# Altium PCB MT-MONITOR V1.0.0.PcbDoc (part 3 of 3)
Units mil, origin at the board's own origin, x right, y up, seen from the top; angles counter-clockwise.
Board outline 6300 x 4410 mil, 2 copper layers (Top Layer, Bottom Layer); 313 components, 231 nets, 1781 pads, 138 vias.
Unrouted connection lines stored in the file: 1.
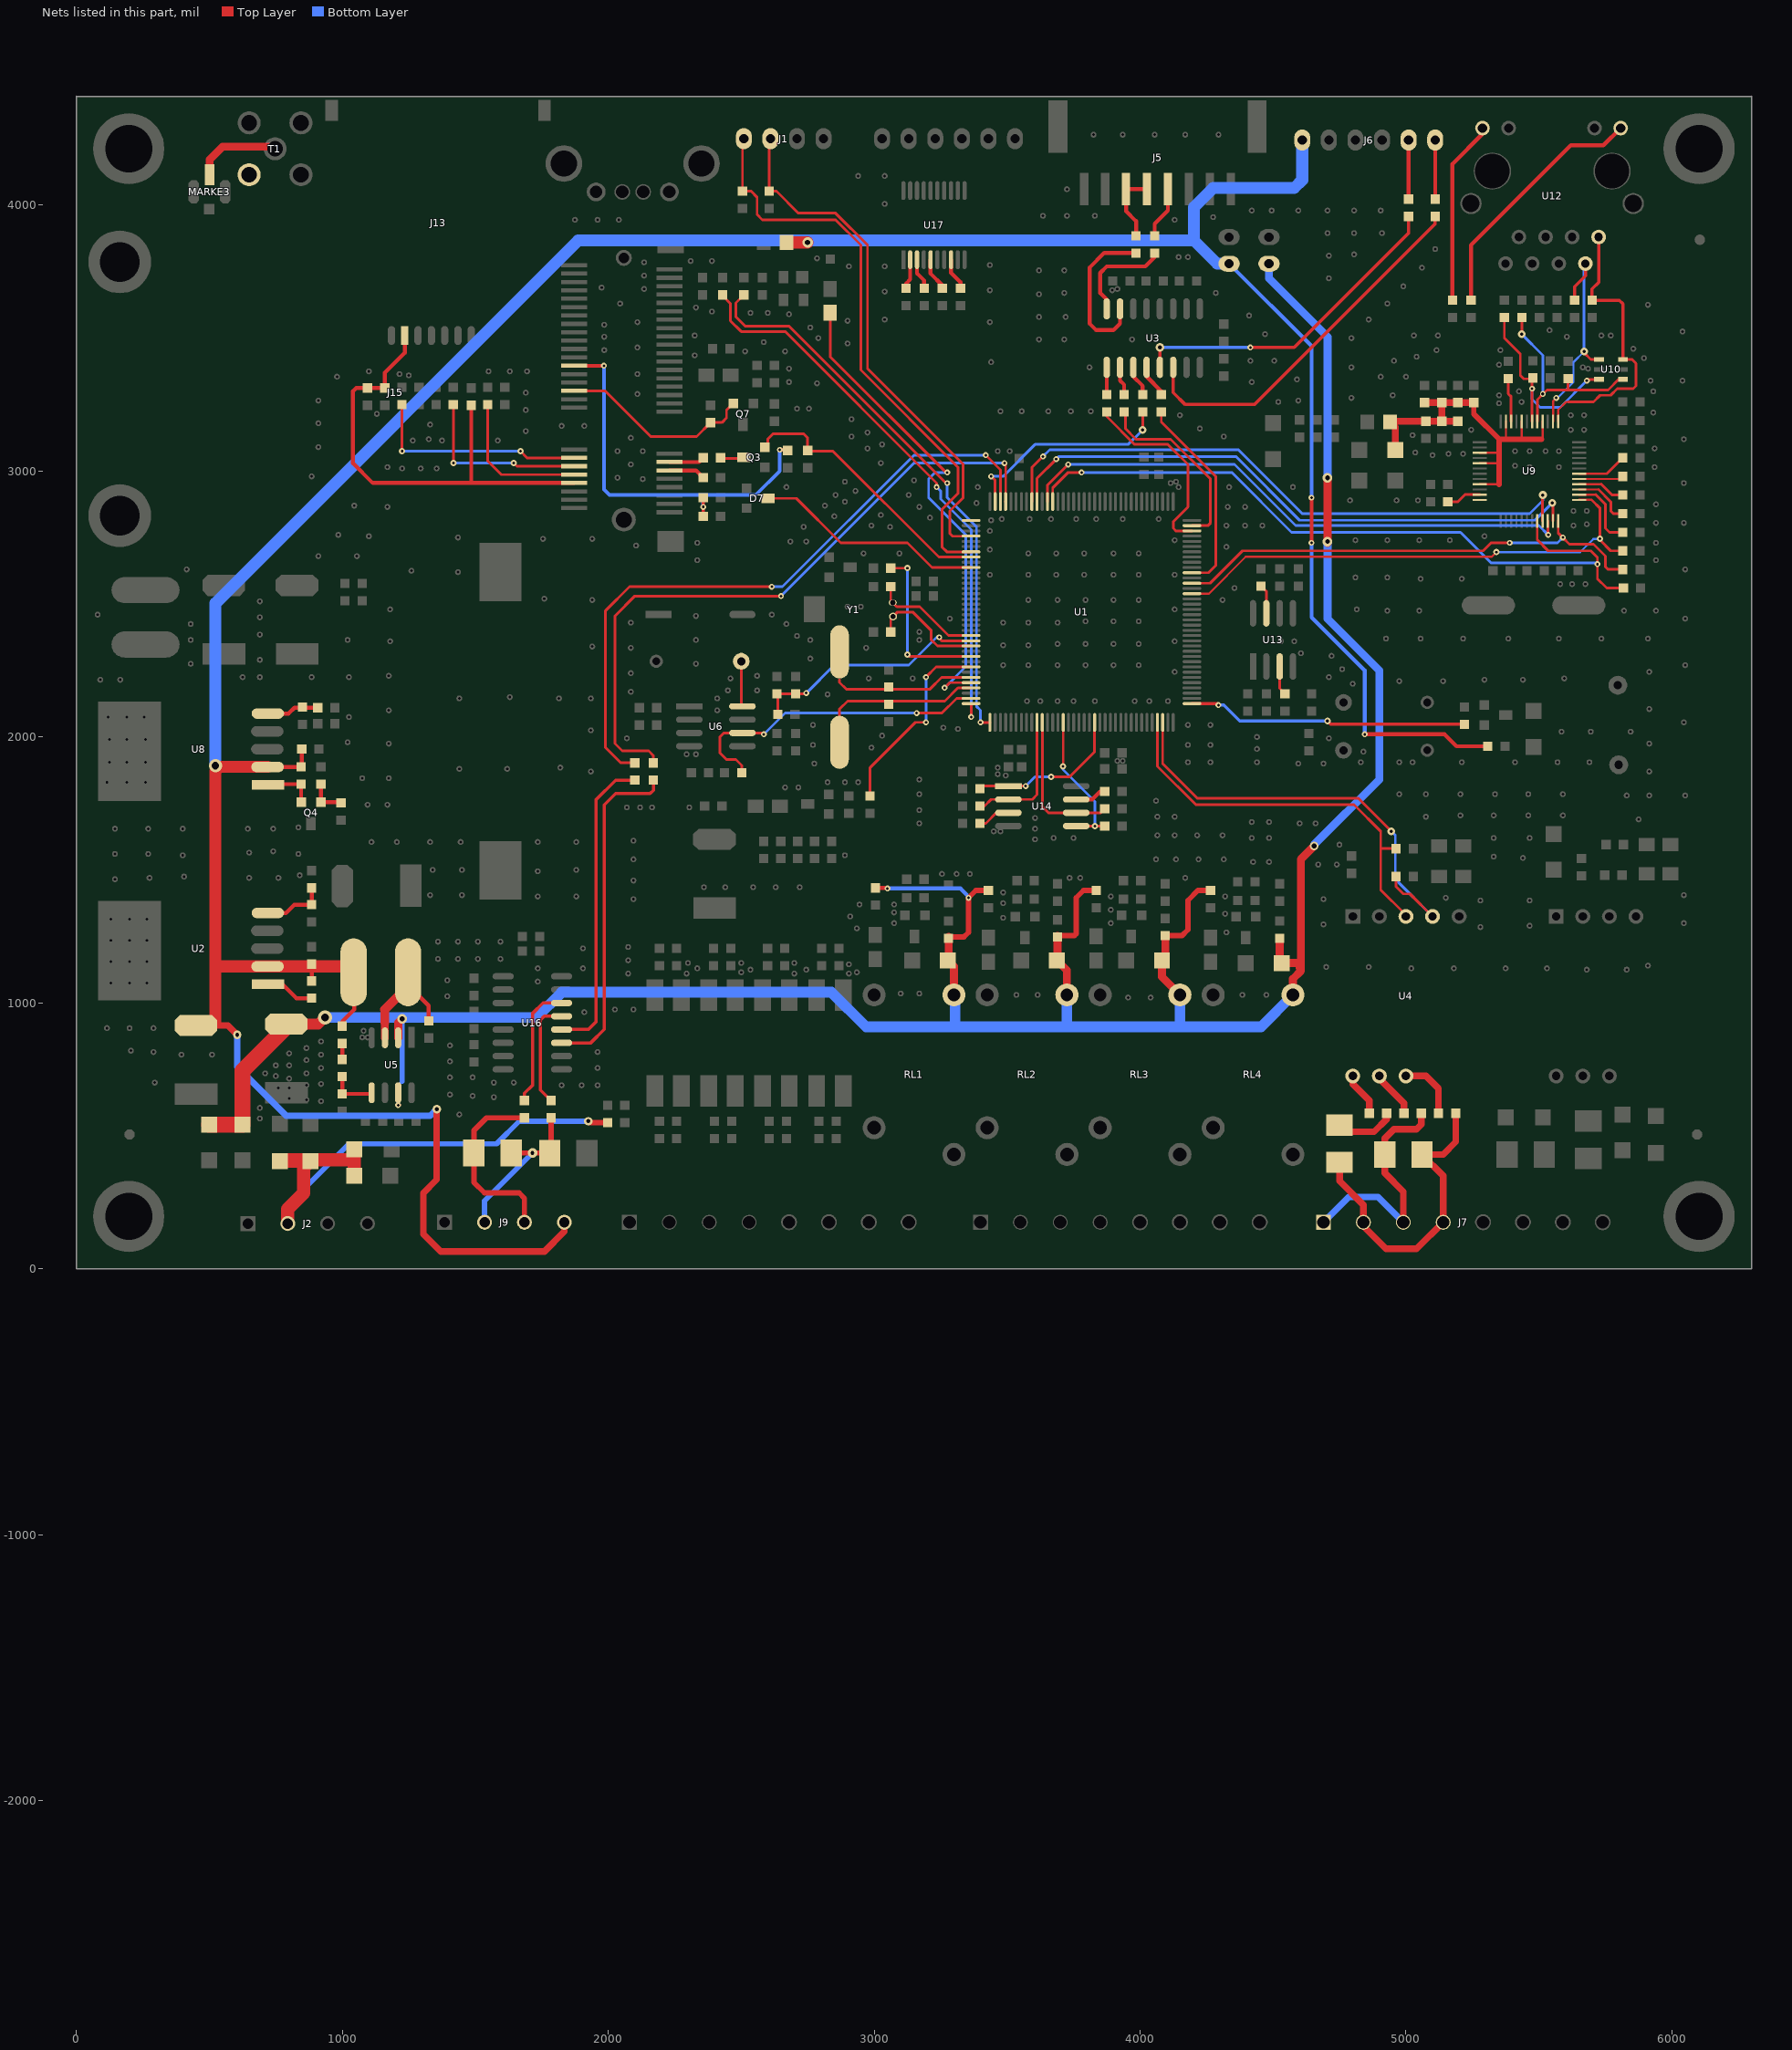
[diagram p3: the nets of this part, all layers, seen from the top]

## Via types
v1: diameter 22, hole 10, Top Layer to Bottom Layer, 82 vias
v2: diameter 24, hole 10, Top Layer to Bottom Layer, 15 vias
v3: diameter 30, hole 12, Top Layer to Bottom Layer, 10 vias
v4: diameter 32, hole 15, Top Layer to Bottom Layer, 7 vias
v5: diameter 36, hole 18, Top Layer to Bottom Layer, 4 vias
v6: diameter 36, hole 20, Top Layer to Bottom Layer, 3 vias
v7: diameter 32, hole 12, Top Layer to Bottom Layer, 2 vias
v8: diameter 40, hole 20, Top Layer to Bottom Layer, 2 vias
v9: diameter 36, hole 15, Top Layer to Bottom Layer, 2 vias
v10: diameter 62, hole 30, Top Layer to Bottom Layer, 2 vias
v11: diameter 52, hole 28, Top Layer to Bottom Layer, 1 vias
v12: diameter 24, hole 12, Top Layer to Bottom Layer, 1 vias
v13: diameter 32, hole 18, Top Layer to Bottom Layer, 1 vias
v14: diameter 50, hole 28, Top Layer to Bottom Layer, 1 vias
v15: diameter 32, hole 16, Top Layer to Bottom Layer, 1 vias
v16: diameter 28, hole 15, Top Layer to Bottom Layer, 1 vias
v17: diameter 22, hole 12, Top Layer to Bottom Layer, 1 vias
v18: diameter 25, hole 12, Top Layer to Bottom Layer, 1 vias
v19: diameter 42, hole 20, Top Layer to Bottom Layer, 1 vias

## Nets (pads, with @x,y where several pads share a name; then routed paths per layer and width w, separated by ;. In a path a pad name is that pad's centre, name@x,y a point inside that pad or via, vN(x,y) a via of type N, cw(c..) or ccw(c..) an arc to the next point about the centre after c; other vN are vias at no path point) (continued)
NetQ3_2: Q3.2 R92.1 | length 98.2
  Top Layer w10: R92.1@2422.5,3050 R92.1@2424.99,3047.51
  Top Layer w12: R92.1@2424.99,3047.51 Q3.2@2519.65,3047.51
NetQ4_1: Q4.1 R93.2 R94.2 | length 143.5
  Top Layer w15: R94.2@920,1822.5 920,1755.15 Q4.1@920.49,1754.65 992.85,1754.65 R93.2@995,1752.5
NetQ4_3: Q4.3 R42.1 U8.1 | length 194
  Top Layer w15: U8.1@720.05,1820.15 722.4,1822.5 R42.1@845,1822.5 845,1755.15 Q4.3@845.49,1754.65
NetR3_2: R3.2 R4.1 | length 60
  Top Layer w15: R4.1@1000,787.5 R3.2@1000,847.5
NetR4_2: R4.2 R25.1 U5.5 | length 177.1
  Top Layer w15: R4.2@1000,722.5 R25.1@1000,657.5 1105.77,657.5 U5.5@1110.24,661.98
NetR5_2: R5.2 U2.1 | length 186.8
  Top Layer w15: U2.1@720.05,1070.15 774.85,1070.15 827.5,1017.5 R5.2@885,1017.5
NetR6_1: R6.1 R7.2 U2.5 | length 241.1
  Top Layer w15: U2.5@720.05,1338.15 788.15,1338.15 819.17,1369.17 R6.1@885,1369.17 R7.2@885,1432.5
NetR8_2: R8.2 U1.27 | length 630.2
  Top Layer w10: R8.2@3062.5,2635 v2(3125,2635) ; v2(3125,2310) 3132.32,2302.68 U1.27@3364.65,2302.68
  Bottom Layer w10: v2(3125,2310) v2(3125,2635)
NetR10_1: R10.1 U4.10 | length 165.9
  Top Layer w25: U4.10@4800,725 4800,695 4862.5,632.5 R10.1@4862.5,585
NetR10_2: R10.2 TVS3.1 | length 229.8
  Top Layer w25: TVS3.1@4750.25,540.09 4775.34,515 4880,515 4927.5,562.5 R10.2@4927.5,585
NetR11_2: R11.2 U3.12 | length 125.6
  Top Layer w15: U3.12@4024.7,3390.2 4024.7,3355.3 4080,3300 R11.2@4080,3287.5
NetR12_1: R12.1 U3.13 | length 1250.5
  Top Layer w12: U3.13@4074.7,3390.2 4074.7,3464.7 v15(4075,3465) ; v1(4415,3465) 4580,3465 5010,3895 R12.1@5010,3957.5
  Bottom Layer w12: v15(4075,3465) v1(4415,3465)
NetR13_2: R13.2 U3.9 | length 102.8
  Top Layer w15: U3.9@3874.7,3390.2 3874.7,3287.8 R13.2@3875,3287.5
NetR14_1: R14.1 U3.8 | length 389.9
  Top Layer w15: U3.8@3874.7,3610.2 3874.7,3645.3 3850,3670 3850,3745 3875,3770 4020,3770 4055,3805 R14.1@4055,3820
NetR15_2: R15.2 U3.11 | length 117.3
  Top Layer w15: U3.11@3974.7,3390.2 3974.7,3355.3 4010,3320 R15.2@4010,3287.5
NetR16_1: R16.1 U3.14 | length 1408.1
  Top Layer w12: U3.14@4124.7,3390.2 4124.7,3295.3 4170,3250 4430,3250 5110,3930 R16.1@5110,3957.5
NetR17_2: R17.2 U3.10 | length 109
  Top Layer w15: U3.10@3924.7,3390.2 3924.7,3340.3 3940,3325 R17.2@3940,3287.5
NetR18_1: R18.1 U3.7 | length 598.6
  Top Layer w15: U3.7@3924.7,3610.2 3924.7,3554.7 3900,3530 3835,3530 3810,3555 3810,3765 3865,3820 R18.1@3985,3820
NetR19_1: R19.1 U4.9 | length 178.3
  Top Layer w25: U4.9@4900,725 4900,715 4992.5,622.5 R19.1@4992.5,585
NetR22_1: R22.1 U4.8 | length 234.7
  Top Layer w25: U4.8@5000,725 5075,725 5122.5,677.5 R22.1@5122.5,585
NetR31_2: R31.2 U17.5 | length 125.9
  Top Layer w15: U17.5@3212.36,3795 3212.36,3742.64 3256.67,3698.33 R31.2@3256.67,3687.5
NetR32_2: R32.2 U17.8 | length 122.4
  Top Layer w15: U17.8@3289.13,3795 3289.13,3745.87 3325,3710 R32.2@3325,3687.5
NetR43_1: R43.1 R91.1 U8.5 | length 196.5
  Top Layer w15: U8.5@720.05,2088.15 798.15,2088.15 820,2110 R91.1@907.5,2110
NetR54_1: R54.1 U9.10 | length 159.9
  Top Layer w10: R54.1@5385,3342.5 5385,3290.59 5395.59,3280 U9.10@5395.59,3187
NetR63_2: R63.2 U17.2 | length 114
  Top Layer w15: R63.2@3120,3687.5 3120,3705 3135.59,3720.59 U17.2@3135.59,3795
NetR64_2: R64.2 U17.3 | length 118.7
  Top Layer w15: U17.3@3161.18,3795 3161.18,3743.82 3188.33,3716.67 R64.2@3188.33,3687.5
NetR70_2: R70.2 U12.9 | length 952.2
  Top Layer w15: R70.2@5245,3642.5 5245,3850 5620,4225 5742.71,4225 U12.9@5807.49,4289.78
NetR71_2: R71.2 U12.12 | length 694
  Top Layer w15: R71.2@5175,3642.5 5175,4155 5287.81,4267.81 U12.12@5287.81,4289.78
NetR74_2: R74.2 U13.3 | length 110.8
  Top Layer w10: U13.3@4525,2265 4525,2182.5 R74.2@4545,2162.5
NetR77_2: R77.2 U13.7 | length 110.8
  Top Layer w10: R77.2@4455,2567.5 4475,2547.5 U13.7@4475,2465
NetR80_2: R80.2 U14.3 | length 124.1
  Top Layer w10: R80.2@3397.5,1675 3420,1675 3460,1715 U14.3@3505,1715
NetR83_2: R83.2 U14.7 | length 119.9
  Top Layer w15: U14.7@3760,1765 3820,1765 3850,1795 R83.2@3867.5,1795
NetR143_2: R143.2 U16.12 | length 1152.8
  Top Layer w12: U16.12@1824.8,899.7 1924.7,899.7 1955,930 1955,1765 2027.5,1837.5 R143.2@2100,1837.5
NetR144_2: R144.2 U16.11 | length 1271.3
  Top Layer w12: U16.11@1824.8,849.7 1934.7,849.7 1985,900 1985,1745 2027.5,1787.5 2157.5,1787.5 2170,1800 R144.2@2170,1837.5
NetR145_1: R145.1 U16.13 | length 405.1
  Top Layer w12: R145.1@1785,632.5 1744.85,672.65 1744.85,934.85 1759.7,949.7 U16.13@1824.8,949.7
NetR146_1: R146.1 U16.14 | length 466
  Top Layer w12: R146.1@1685,632.5 1685,660 1715,690 1715,959.7 1755,999.7 U16.14@1824.8,999.7
NetSW1_2: SW1.2 U6.8 | length 171.2
  Top Layer w10: SW1.2@2500.22,2284.57 2500.22,2119.78 U6.8@2504.76,2115.24
NOR_CS: R82.2 U1.57 U14.1 | length 599.8
  Top Layer w10: R82.2@3397.5,1805 3407.5,1815 U14.1@3505,1815 v1(3570,1815) ; v2(3665,1850) 3735,1850 3829.21,1944.21 U1.57@3829.21,2054.65
  Bottom Layer w10: v1(3570,1815) 3605,1850 v2(3665,1850)
NOR_MISO: R81.2 U1.46 U14.2 | length 504.8
  Top Layer w10: R81.2@3397.5,1740 3415,1740 3440,1765 U14.2@3505,1765 3595,1765 3612.68,1782.68 U1.46@3612.68,2054.65
NOR_MOSI: R85.2 U1.51 U14.5 | length 547.3
  Top Layer w10: v2(3710,1890) 3711.1,1891.1 U1.51@3711.1,2054.65 ; U14.5@3760,1665 v2(3830,1665) R85.2@3867.49,1665
  Bottom Layer w10: v2(3710,1890) 3710,1877.2 3830,1757.2 v2(3830,1665)
NOR_SCK: R84.2 U1.47 U14.6 | length 567.7
  Top Layer w10: U1.47@3632.36,2054.65 3632.36,1737.64 3655,1715 U14.6@3760,1715 3852.5,1715 R84.2@3867.5,1730
nRST: C29.2 R30.2 R33.2 U1.24 | length 904.6
  Top Layer w10: R33.2@2637.5,2085 2637.5,2160 R30.2@2635,2162.5 C29.2@2705,2162.5 2742.5,2162.5 v1(2745,2165) ; v1(3245,2375) 3250,2370 3250,2365 3253.27,2361.73 U1.24@3364.65,2361.73
  Bottom Layer w10: v1(2745,2165) 2850,2270 3130,2270 3235,2375 v1(3245,2375)
P23: R49.1 U9.23 | length 130.9
  Top Layer w10: R49.1@5157.5,2885 5195,2885 5221.41,2911.41 U9.23@5277.48,2911.41
P38: R60.1 U9.38 | length 274.8
  Top Layer w8: U9.38@5651.49,2911.41 5713.59,2911.41
  Top Layer w10: 5713.59,2911.41 5750,2875 5750,2785 5765,2770 R60.1@5815,2770
P39: R59.1 U9.39 | length 221.7
  Top Layer w8: U9.39@5651.49,2931.1 5723.91,2931.1
  Top Layer w10: 5723.91,2931.1 5770,2885 5770,2850 5780,2840 R59.1@5815,2840
P40: R57.1 U9.40 | length 180.4
  Top Layer w8: U9.40@5651.49,2950.78 5734.22,2950.78
  Top Layer w10: 5734.22,2950.78 5775,2910 R57.1@5815,2910
P41: R55.1 U9.41 | length 167.5
  Top Layer w8: U9.41@5651.49,2970.47 R55.1@5805.47,2970.47
  Top Layer w10: R55.1@5805.47,2970.47 R55.1@5815,2980
P42: R50.2 U9.42 | length 188.3
  Top Layer w8: U9.42@5651.49,2990.15 5755.15,2990.15
  Top Layer w10: 5755.15,2990.15 R50.2@5814.99,3050
RESET_N: J15.22 Q7.3 R115.2 | length 738.6
  Top Layer w10: J15.22@1871.73,3301.69 1988.31,3301.69 2160,3130 2332.5,3130 R115.2@2385,3182.5 2427.5,3182.5 2445,3200 2445,3229.16 Q7.3@2470.49,3254.65
RTCK1: C36.1 U1.23 Y1.1 | length 408.9
  Top Layer w10: C36.1@3062.5,2565 3062.5,2512.5 Y1.1@3070,2505 3085,2490 3171.42,2490 3280,2381.42 U1.23@3364.65,2381.42
RTCK2: C40.1 U1.25 Y1.2 | length 435.7
  Top Layer w10: C40.1@3062.5,2395 3062.5,2444.5 Y1.2@3071,2453 3088,2470 3145,2470 3215,2400 3215,2365 3237.95,2342.05 U1.25@3364.65,2342.05
RUN: R34.1 U1.29 | length 743.4
  Top Layer w10: R34.1@2985,1777.5 2985,1885 3155,2055 v1(3195,2055) ; v1(3195,2225) 3233.31,2263.31 U1.29@3364.65,2263.31
  Bottom Layer w10: v1(3195,2055) v1(3195,2225)
run_buzzer: R62.2 U1.73 | length 1057
  Top Layer w12: U1.73@4195.35,2125.51 4289.49,2125.51 v1(4295,2120) ; v18(4705,2060) 4717.5,2047.5 R62.2@5220,2047.5
  Bottom Layer w12: v1(4295,2120) 4315,2120 4375,2060 v18(4705,2060)
RxD: J15.11 R44.1 | length 138.9
  Top Layer w15: J15.11@2230,3002.48 2330.02,3002.48 R44.1@2357.5,2975
RXIN: C51.1 R68.2 U9.6 U10.3 | length 798.6
  Top Layer w10: C51.1@5370,3577.5 5370,3500 5430,3440 5430,3360 5443.17,3346.83 5474.33,3346.83 v1(5474.33,3310) U9.6@5474.33,3187 ; v1(5680,3340) 5684.92,3344.92 U10.3@5725.5,3344.92
  Bottom Layer w10: v1(5474.33,3310) 5474.33,3270.67 5505,3240 5580,3240 v1(5680,3340)
RXIP: C47.1 R69.2 U9.5 U10.4 | length 799
  Top Layer w10: v3(5435,3515) 5436,3516 C47.1@5436,3577.5 ; U9.5@5494.01,3187 5494.01,3269.01 v17(5515,3290) 5530,3305 5610,3305 ; R69.2@5610,3347.5 5610,3305 ; U10.4@5816.05,3344.92 5799.92,3344.92 5760,3305 5610,3305
  Bottom Layer w10: v3(5435,3515) 5515,3435 v17(5515,3290)
S_NET_CLK: U1.136 U9.33 | length 2315.1
  Top Layer w10: U1.136@3592.99,2885.35 3592.99,3012.99 v1(3635,3055) ; U9.33@5513.7,2812.98 5513.7,2908.7 v3(5515,2910)
  Bottom Layer w10: v1(3635,3055) 3660,3080 4370,3080 4610,2840 5465,2840 5515,2890 v3(5515,2910)
S_NET_CS: R48.1 U1.132 U9.32 | length 2784
  Top Layer w8: 5494.01,2740.99 U9.32@5494.01,2812.98
  Top Layer w10: U1.132@3671.73,2885.35 3671.73,2936.73 3730,2995 v1(3780,2995) ; 5494.01,2740.99 5535,2700 5695,2700 5720,2675 v1(5720,2650) 5720,2595 5755,2560 R48.1@5817.5,2560
  Bottom Layer w10: v1(3780,2995) 4345,2995 4570,2770 5205,2770 5320,2655 5715,2655 v1(5720,2650)
S_NET_MISO: U1.133 U9.34 | length 2140.4
  Top Layer w10: U1.133@3652.05,2885.35 3652.05,2947.05 v1(3730,3025) ; U9.34@5533.38,2812.98 5533.38,2761.62 v1(5535,2760)
  Bottom Layer w10: v1(3730,3025) 4355,3025 4585,2795 5500,2795 v1(5535,2760)
S_NET_MOSI: U1.135 U9.35 | length 2253.4
  Top Layer w10: U1.135@3612.68,2885.35 3612.68,2972.68 v1(3685,3045) ; v3(5550,2880) 5553.07,2876.93 U9.35@5553.07,2812.98
  Bottom Layer w10: v1(3685,3045) 3695,3055 4360,3055 4600,2815 5485,2815 v3(5550,2880)
SGND: C72.1 J2.2 L7.1 L8.1 R102.1 R116.1 | length 2187.1
  Top Layer w20: v4(1925,555) 1930,550 R102.1@1997.5,550
  Top Layer w50: J2.2@795,170 795,225 855,285 855,380.29 L7.1@880.04,405.33 L8.1@765.04,405.33 769.71,410 1045,410 C72.1@1045,350 ; 1045.33,395.33 R116.1@1045.33,449.96
  Bottom Layer w20: J2.2@795,170 795,240 1025,470 1580,470 1665,555 v4(1925,555)
SPD_LED: U9.24
SW0: C89.1 L9.1 U5.3 | length 394.5
  Top Layer w15: L9.1@1247.36,1062.12 1252.88,1062.12 1325,990 C89.1@1325,932.5
  Top Layer w30: U5.3@1160.24,868.67 1160.24,924.76
  Top Layer w32: 1160.24,924.76 1160.24,975
  Top Layer w35: 1160.24,975 L9.1@1247.36,1062.12
T1: MARKE3.1 T1.1 | length 325.7
  Top Layer w30: MARKE3.1@500.94,4115 500.94,4170.94 550,4220 739.27,4220 747.16,4212.11
TCK: J1.1 R2.1 U1.7 | length 2207.9
  Top Layer w10: J1.1@2505,4265 R2.1@2505,4052.5 2537.5,4052.5 2560,4030 2560,3965 2580,3945 2855,3945 2950,3850 2950,3380 3315,3015 3315,2915 3255,2855 3255,2715 3273.62,2696.38 U1.7@3364.65,2696.38
TDO: U1.1
TMS: J1.2 R1.1 U1.4 | length 2005.2
  Top Layer w10: J1.2@2605,4265 R1.1@2605,4052.5 2632.5,4052.5 2715,3970 2855,3970 2975,3850 2975,3385 3335,3025 3335,2900 3285,2850 3285,2765 3295,2755 3364.21,2755 U1.4@3364.65,2755.43
TxD: J15.13 R92.2 | length 134.1
  Top Layer w15: J15.13@2230,3033.98 2341.48,3033.98 R92.2@2357.5,3050
TXON: R65.1 U9.2 U10.1 U12.2 | length 872.4
  Top Layer w8: U9.2@5553.07,3187 5553.07,3263.07 v1(5565,3275)
  Top Layer w10: v3(5670,3450) 5670,3445 5695.28,3419.72 U10.1@5725.5,3419.72
  Top Layer w12: R65.1@5634,3642.5 5634,3694 5674.82,3734.82 U12.2@5674.82,3780.33
  Bottom Layer w8: v1(5565,3275) 5570,3275 5630,3335 5630,3410 v3(5670,3450)
  Bottom Layer w10: v3(5670,3450) 5670,3775.52 U12.2@5674.82,3780.33
TXOP: R66.1 U9.1 U10.6 U12.1 | length 1091.6
  Top Layer w8: U9.1@5572.75,3187 5572.75,3230 5602.75,3260 5610,3260
  Top Layer w10: 5610,3260 5705,3260 5730,3285 5770,3285 5795,3310 5855,3310 5865,3320 5865,3405 5850.28,3419.72 U10.6@5816.05,3419.72
  Top Layer w12: U12.1@5724.82,3880.33 5724.82,3709.82 5700,3685 R66.1@5700,3642.5 5802.5,3642.5 5816.05,3628.95 U10.6@5816.05,3419.72
U0-RX: J9.2 R145.2 TVS1.2 TVS2.2 | length 617.1
  Top Layer w20: TVS1.2@1634.91,435.25 v9(1715,435.25) 1785,435.25 R145.2@1785,567.5
  Bottom Layer w20: J9.2@1535,175 1535,255.25 v9(1715,435.25)
U0-RXD: R143.1 U1.142 | length 2518.5
  Top Layer w10: R143.1@2100,1902.5 2047.5,1902.5 1990,1960 1990,2475 2080,2565 v1(2615,2565) ; v1(3420,3060) 3474.88,3005.12 U1.142@3474.88,2885.35
  Bottom Layer w10: v1(2615,2565) 2655,2565 3150,3060 v1(3420,3060)
U0-TX: J9.3 R146.2 TVS1.1 | length 709.6
  Top Layer w20: J9.3@1685,175 1685,265 1665,285 1535,285 1494.91,325.09 TVS1.1@1494.91,435.25 1494.91,519.91 1542.5,567.5 R146.2@1685,567.5
U0-TXD: R144.1 U1.141 | length 2521.2
  Top Layer w10: R144.1@2170,1902.5 2170,1930 2152.5,1947.5 2052.5,1947.5 2025,1975 2025,2455 2100,2530 v1(2650,2530) ; v1(3490,3030) 3495,3025 3495,2885.79 U1.141@3494.57,2885.35
  Bottom Layer w10: v1(2650,2530) 3150,3030 v1(3490,3030)
U1-RX: J5.4 R14.2 | length 195.7
  Top Layer w15: R14.2@4055,3885 4055,3930 4104.96,3979.96 J5.4@4104.96,4060
U1-TX: J5.5 J5.6 R18.2 | length 269.3
  Top Layer w15: R18.2@3985,3885 3985,3940 3947.48,3977.52 J5.6@3947.48,4060 J5.5@4026.22,4060
U1_RXD: R13.1 U1.106 | length 734.3
  Top Layer w10: R13.1@3875,3222.5 3875,3205 3980,3100 4105,3100 4180,3025 4180,2865 4125,2810 4125,2785 4134.88,2775.12 U1.106@4195.35,2775.12
U1_TXD: R17.1 U1.107 | length 702.1
  Top Layer w10: R17.1@3940,3222.5 3945,3217.5 3945,3160 3985,3120 4115,3120 4265,2970 4265,2805 4254.8,2794.8 U1.107@4195.35,2794.8
U2_RXD: R21.2 U1.70 U4.4 | length 1726
  Top Layer w10: U1.70@4085.12,2054.65 4085.12,1899.88 4215,1770 4820,1770 v3(4945,1645) ; R21.2@4962.5,1475 4962.5,1437.5 4990,1410 5015,1410 U4.4@5100,1325
  Bottom Layer w10: v3(4945,1645) 4960,1630 4960,1465 U4.4@5100,1325
U2_TXD: R20.2 U1.69 U4.3 | length 1520.7
  Top Layer w10: U1.69@4065.43,2054.65 4065.43,1889.57 4210,1745 4805,1745 4905,1645 4905,1580 ; R20.2@4962.5,1580 4905,1580 ; U4.3@4995,1325 4995,1335 4905,1425 4905,1580
U3_RXD: Q3.3 R45.2 U1.8 | length 1028.3
  Top Layer w10: Q3.3@2599.65,3084.51 2599.65,3119.65 2620,3140 2735,3140 2750,3125 R45.2@2750,3077.5 2752.5,3075 2845,3075 3243.31,2676.69 U1.8@3364.65,2676.69
U3_TXD: D7.2 U1.10 | length 872.1
  Top Layer w10: D7.2@2600.35,2897.49 2707.51,2897.49 2875,2730 3125,2730 3217.68,2637.32 U1.10@3364.65,2637.32
U4_485A: J7.1 J7.3 R19.2 TVS4.2 | length 924.4
  Top Layer w25: J7.3@4990,175 4990,290 4920.09,359.91 TVS4.2@4920.09,429.75 4920.09,490.09 4955,525 5040,525 5057.5,542.5 R19.2@5057.5,585
  Bottom Layer w25: J7.1@4690,175 4785,270 4895,270 J7.3@4990,175
U4_485B: J7.2 J7.4 R22.2 TVS3.2 TVS4.1 | length 1196.4
  Top Layer w25: TVS3.2@4750.25,400.09 4750.25,329.75 4840,240 J7.2@4840,175 4840,160 4925,75 5040,75 J7.4@5140,175 5140,349.83 TVS4.1@5060.09,429.75 5139.75,429.75 5187.5,477.5 R22.2@5187.5,585
U4_RX: J6.5 R12.2 | length 222.5
  Top Layer w15: R12.2@5010,4022.5 J6.5@5010,4245
U4_RXD: R11.1 U1.98 | length 763.4
  Top Layer w10: R11.1@4080,3222.5 4080,3185 4285,2980 4285,2645 4257.64,2617.64 U1.98@4195.35,2617.64
U4_TX: J6.6 R16.2 | length 222.5
  Top Layer w15: R16.2@5110,4022.5 J6.6@5110,4245
U4_TXD: R15.1 U1.143 | length 810.9
  Top Layer w10: v1(3440,2980) 3455.2,2964.8 U1.143@3455.2,2885.35 ; v3(4010,3155) R15.1@4010,3222.5
  Bottom Layer w10: v1(3440,2980) 3485,2980 3605,3100 3955,3100 v3(4010,3155)
UIM-CLK: J15.12 R100.2 | length 686.6
  Top Layer w10: v2@1417.5,3022.5 v2(1417.5,3030) R100.2@1417.5,3249.99 ; v2(1645,3030) 1656.77,3018.23 J15.12@1871.73,3018.23
  Bottom Layer w10: v2(1417.5,3030) v2(1645,3030)
UIM-I/O: J15.10 R99.2 | length 558
  Top Layer w10: R99.2@1546.88,3249.99 1546.88,3038.12 1598.27,2986.73 J15.10@1871.73,2986.73
UIM-RST: J15.14 R98.2 | length 832.5
  Top Layer w10: R98.2@1224.38,3249.99 1224.38,3075.62 v2(1225,3075) ; v2(1670,3075) 1695.27,3049.73 J15.14@1871.73,3049.73
  Bottom Layer w10: v2(1225,3075) v2(1670,3075)
UIM-VCC: C66.1 C67.1 J13.1 J15.8 R97.2 | length 1780.8
  Top Layer w15: J13.1@1235,3510 1235,3445 1160,3370 C66.1@1160,3312.5 C67.1@1095,3312.5 1052.5,3312.5 1040,3300 1040,3030 1114.76,2955.24 1480,2955.24 ; R97.2@1485,3247.5 1485,2960.24 1480,2955.24 ; J15.8@1871.73,2955.24 1480,2955.24
USB_LED: LED2.2 U1.32 | length 1849.3
  Top Layer w10: LED2.2@2834.66,3594.91 2834.66,3430.34 3270,2995 v1(3275,2995) ; v1(3265,2185) 3284.25,2204.25 U1.32@3364.65,2204.25
  Bottom Layer w10: v1(3265,2185) 3345,2265 3345,2760 3205,2900 3205,2970 3230,2995 v1(3275,2995)
USBD2+: R87.2 U1.36 | length 2122.1
  Top Layer w10: R87.2@2430,3662.5 2430,3660 2460,3630 2460,3565 2500,3525 2665,3525 3235,2955 v1(3235,2940) ; U1.36@3364.65,2125.51 3364.65,2075.35 v1(3365,2075)
  Bottom Layer w10: v1(3235,2940) 3250,2925 3250,2895 3365,2780 v1(3365,2075)
USBD2-: R86.2 U1.37 | length 2134.8
  Top Layer w10: R86.2@2510,3662.5 2480,3632.5 2480,3580 2515,3545 2680,3545 v1@3272.5,2952.5 ; v1(3400,2055) 3400.35,2054.65 U1.37@3435.51,2054.65
  Bottom Layer w10: v1(3275,2955) 3275,2900 3385,2790 3385,2115 3400,2100 v1(3400,2055)
VCC33A: C46.1 C50.1 C53.1 C54.1 C55.1 C56.1 C57.1 C58.1 L3.2 U9.4 U9.8 U9.11 U9.15 U9.17 U9.21 | length 1553.1
  Top Layer w8: U9.21@5277.48,2950.78 5349.22,2950.78 5350,2950 ; U9.17@5277.48,3029.52 5349.52,3029.52 5350,3030 ; U9.15@5277.48,3068.89 5348.89,3068.89 5350,3070 ; 5375,3120 5375.9,3120.9 U9.11@5375.9,3187 ; U9.8@5434.96,3187 5434.96,3120.04 5435,3120 ; 5510,3120 5513.7,3123.7 U9.4@5513.7,3187
  Top Layer w20: C57.1@5255,3257.5 5255,3215 5350,3120 ; 5350,2950 5350,3030 5350,3070 5350,3120 ; 5510,3120 5435,3120 5375,3120 5350,3120
  Top Layer w25: C46.1@4959.92,3079.52 4959.92,3165.08 L3.2@4940,3185 4942.5,3187.5 C50.1@5075,3187.5 C53.1@5135,3187.5 ; C55.1@5070,3257.5 C56.1@5135,3257.5 ; C54.1@5195,3187.5 C53.1@5135,3187.5 ; C57.1@5255,3257.5 C58.1@5195,3257.5 C56.1@5135,3257.5 ; C53.1@5135,3187.5 C56.1@5135,3257.5
VDD5V: C17.2 C21.2 EC4.1 F1.1 J6.1 J9.4 L4.1 L9.2 R3.1 R5.1 R42.2 R56.2 U2.2 U8.2 | length 12676.7
  Top Layer w15: U8.2@719.05,1887.15 719.4,1887.5 R42.2@845,1887.5 847.5,1890 C17.2@847.5,1955 ; R5.1@885,1082.5 885,1137.15 C21.2@885,1145.84 ; R3.1@1000,912.5 1000,930 1045,975 1045,1112.64 L9.2@1042.64,1115 ; v1(4645,2730) v1(4645,2900) ; v1(4845,2010) 5145,2010 5190,1965 R56.2@5307.5,1965
  Top Layer w25: EC4.1@449.57,915.01 505.71,915.01 569.99,915.01 v4(605,880) ; v4(1355,600) 1355,335 1305,285 1305,130 1370,65 1760,65 1835,140 J9.4@1835,175
  Top Layer w45: EC4.1@505.71,915.01 522.85,932.15 522.85,1137.15 ; U8.2@719.05,1887.15 537.15,1887.15 522.85,1872.85 522.85,1137.15 ; L9.2@1020.49,1137.15 885,1137.15 U2.2@719.05,1137.15 522.85,1137.15 ; F1.1@2670,3860 v8(2750,3860)
  Bottom Layer w15: L4.1@4335,3780 4645,3470 v1(4645,2900) ; v1(4645,2730) 4645,2450 4845,2250 v1(4845,2010)
  Bottom Layer w25: v4(605,880) 605,760 789.5,575.5 1330.5,575.5 v4(1355,600)
  Bottom Layer w45: v14(522.85,1892.15) 522.85,2502.85 1887.5,3867.5 4202.5,3867.5 ; L4.1@4335,3780 4290,3780 4202.5,3867.5 ; J6.1@4610,4245 4610,4095 4580,4065 4275,4065 4202.5,3992.5 4202.5,3867.5
VDD12V: C73.1 C74.2 C75.2 C76.1 D8.2 D9.2 D12.2 D15.2 D17.2 D20.2 EC3.1 L5.2 R117.2 R118.2 R119.2 R120.2 RL1.2 RL2.2 RL3.2 RL4.2 U5.2 U5.7 | length 10512.9
  Top Layer w12: v1(1210,615) 1210.24,615.24 1210.49,615 v1@1215,615
  Top Layer w15: R117.2@3005,1432.5 3047.5,1432.5 v1(3050,1430)
  Top Layer w20: C73.1@3280,1247.5 3337.5,1247.5 3355,1265 v1(3355,1395) 3382.5,1422.5 R118.2@3430,1422.5 ; C74.2@3690,1252.5 3752.5,1252.5 3760,1260 3760,1395 3787.5,1422.5 R119.2@3835,1422.5 ; C75.2@4095,1252.5 4157.5,1252.5 4180,1275 4180,1385 4217.5,1422.5 R120.2@4265,1422.5
  Top Layer w30: U5.2@1210.24,868.67 1210.24,925.24 v5(1225,940) ; D12.2@3277.5,1160 3300,1137.5 RL1.2@3300,1030 ; D12.2@3280,1162.5 C73.1@3280,1242.5 C73.1@3280,1247.5 ; C74.2@3690,1252.5 C74.2@3690,1247.5 3690,1162.5 D15.2@3687.5,1160 3725,1122.5 RL2.2@3725,1030 ; C75.2@4095,1252.5 4095,1172.5 D20.2@4082.5,1160 4082.5,1097.5 RL3.2@4150,1030 ; C76.1@4525,1242.5 4525,1157.5 D17.2@4532.5,1150 4600,1150 4600,1132.5 ; RL4.2@4575,1030 4575,1090 4605,1120 4605,1540 v13(4655,1590) ; v5@4705,2730 v5(4705,2975)
  Top Layer w40: EC3.1@789.57,920.01 910.01,920.01 v11(935,945)
  Top Layer w60: D9.2@500,542.5 D8.2@625,542.5 625,745 789.57,909.57 EC3.1@789.57,920.01
  Bottom Layer w12: v1(1210,615) 1210,690 1225,705
  Bottom Layer w15: v1(3050,1430) 3325,1430 3355,1400 v1(3355,1395)
  Bottom Layer w20: 1225,705 v5(1225,940)
  Bottom Layer w30: L5.2@4485,3780 4485,3725 4705,3505 v5(4705,2975) ; v13(4655,1590) 4655,1595 4900,1840 4900,2250 4705,2445 v5(4705,2735)
  Bottom Layer w40: v11(935,945) 1730,945 1825,1040 2840,1040 2970,910 3305,910 ; RL1.2@3300,1030 3305,1025 3305,910 ; RL2.2@3725,1030 3725,910 ; RL3.2@4150,1030 4150,910 ; RL4.2@4575,1030 4455,910 4150,910 ; 3305,910 3725,910 ; 3725,910 4150,910
VDD_EXT: C33.1 J15.28 R40.2 R41.2 | length 1511.4
  Top Layer w12: C33.1@2357.5,2830 v1(2357.5,2865) R40.2@2357.5,2900
  Top Layer w13: J15.28@1871.73,3396.18 v1(1983.82,3396.18) ; v1(2645,3080) 2672.5,3080 R41.2@2675,3077.5
  Bottom Layer w12: 2355,2910 2355,2867.5 v1(2357.5,2865)
  Bottom Layer w13: v1(1983.82,3396.18) 1983.82,2931.18 2005,2910 2355,2910 2555,2910 2645,3000 v1(2645,3080)
W5500_/INT: R47.1 U1.96 U9.36 | length 1834
  Top Layer w8: 5572.75,2767.25 U9.36@5572.75,2812.98
  Top Layer w10: U1.96@4195.35,2578.27 4263.27,2578.27 4385,2700 5290,2700 5320,2730 v1(5390,2730) ; 5572.75,2767.25 v1(5590,2750) 5615,2725 5705,2725 5750,2680 5750,2640 5760,2630 R47.1@5815,2630
  Bottom Layer w10: v1(5390,2730) 5570,2730 v1(5590,2750)
W5500_/RST: R46.1 U1.94 U9.37 | length 1940.3
  Top Layer w8: U1.94@4195.35,2538.9 4258.9,2538.9 4397.5,2677.5 5322.5,2677.5 v2(5340,2695) ; U9.37@5651.49,2891.73 5698.27,2891.73
  Top Layer w10: 5698.27,2891.73 5730,2860 v2(5730,2745) 5730,2740 5770,2700 R46.1@5815,2700
  Bottom Layer w8: v2@5345,2700 v2(5340,2695) 5655,2695 5705,2745 v2(5730,2745)
WDI: R28.2 U1.35 U6.6 | length 1198.8
  Top Layer w10: R28.2@2502.5,1865 2502.5,1892.5 2480,1915 2445,1915 2420,1940 2420,2000 2435.24,2015.24 U6.6@2504.76,2015.24 2579.76,2015.24 v1(2585,2010) ; v1(3160,2090) 3255,2090 3310.2,2145.2 U1.35@3364.65,2145.2
  Bottom Layer w10: v1(2585,2010) 2665,2090 v1(3160,2090)
XTAL1: C37.1 U1.31 Y2.2 | length 533.2
  Top Layer w10: 2870,2215 2870,2205 2895,2180 3210,2180 3253.94,2223.94 U1.31@3364.65,2223.94
XTAL2: C41.1 U1.33 Y2.1 | length 652.6
  Top Layer w10: Y2.1@2870,1980 2870,2105 2900,2135 3265.43,2135 3315,2184.57 U1.33@3364.65,2184.57
pads on no net: D7.3 J2.4 J5.0 J5.3 J6.3 J6.4 J10.5 J13.0 J13.5 J13.7 J15.0 J15.1 J15.3 J15.5 J15.6 J15.7 J15.16 J15.17 J15.19 J15.20 J15.23 J15.25 J15.30 J15.31 J15.32 J15.33 J15.36 J15.38 J15.44 J15.45 J15.46 J15.47 J15.48 J15.49 J15.51 J15.53 J15.54 J15.55 J15.56 MAKE1.1 MARKE1.1 MARKE2.1 MARKE3.2 MARKE3.3 T1.2 T1.3 T1.4 T1.5 U1.2 U1.3 U1.5 U1.9 U1.11 U1.12 U1.13 U1.16 U1.19 U1.20 U1.21 U1.26 U1.28 U1.30 U1.34 U1.40 U1.42 U1.43 U1.45 U1.48 U1.50 U1.52 U1.55 U1.56 U1.58 U1.61 U1.71 U1.74 U1.75 U1.78 U1.81 U1.83 U1.84 U1.85 U1.88 U1.91 U1.92 U1.97 U1.99 U1.100 U1.101 U1.104 U1.105 U1.108 U1.109 U1.110 U1.111 U1.112 U1.113 U1.115 U1.116 U1.123 U1.125 U1.126 U1.127 U1.128 U1.129 U1.130 U1.131 U1.134 U1.137 U1.140 U1.144 U5.8 U6.5 U9.7 U9.12 U9.13 U9.18 U9.46 U9.47 U12.0 U12.4 U12.5 U16.7 U16.8 U16.9 U16.10 U17.4 U17.6 U17.7 U17.9 U17.11 U17.13 U17.14 U17.16 Y1.3

## Polygon pours and split planes (outlines as drawn)
DGND on Top Layer "Top Layer-No Net" (solid, pour order 6): 960,3400 1740,3400 1795,3455 1795,3720 1795,3900 1860,3965 1930,3965 2370,3965 2450,4045 2455,4050 2455,4105 2455,4310 2485,4340 2615,4340 5130,4340 5180,4290 5180,4140 5180,3730 5220,3690 5225,3685 5255,3685 5955,3685 6070,3570 6070,3375 6070,1195 5985,1110 5935,1110 4735,1110 4580,955 4360,955 2070,955 2010,895 2005,890 2005,790 2005,95 1965,55 1955,45 1900,45 1365,45 1300,110 1305,115 1305,490 1260,535 715,535 315,535 90,760 55,795 55,905 55,2615 90,2650 100,2660 145,2660 520,2660 565,2660 780,2875 855,2950 855,3295 960,3400
DGND on Bottom Layer "Top Layer-No Net" (solid, pour order 8): 1950,3965 2370,3965 2455,4050 2455,4305 2455,4310 2480,4335 2485,4340 2500,4340 2670,4340 5130,4340 5180,4290 5180,4170 5180,3735 5230,3685 5350,3685 5955,3685 6020,3620 6065,3575 6070,3570 6070,3510 6070,1195 5985,1110 5870,1110 4735,1110 4585,960 4580,955 4545,955 2095,955 2005,865 2005,760 2005,95 1980,70 1955,45 1915,45 1380,45 1305,120 1295,130 1295,415 1295,495 1295,500 1265,530 1260,535 800,535 315,535 265,585 45,805 45,1265 45,2605 100,2660 230,2660 565,2660 605,2700 855,2950 855,3205 855,3295 960,3400 1045,3400 1740,3400 1795,3455 1795,3715 1795,3900 1860,3965 1965,3965

## Keep-outs
Keep-Out Layer:
  lines w10: -0.05,4325 cw(c82.27,4327.18) 85.8,4409.45 ; 0,78.74 0,4330.71 ; 0.5,83.73 ccw(c84.23,83.73) 84.23,0 6181.1,0 ; 78.74,4409.45 6220.47,4409.45 cw(c6220.47,4330.71) 6299.21,4330.71 6299.21,78.74 cw(c6220.47,78.74) 6220.47,0 118.11,0 ; 4915,-2730 5013.71,-2730

## Silkscreen, mask and mechanical layers (free items; w line width, h text height)
Top Overlay:
  circle w10: c6098.15,200 r196.85
  circle w10: c200,195 r196.85
  circle w10: c6105,4215 r196.85
  circle w10: c205,4210 r196.85
  text "SWD" at 2645,4015 h118.11
  text "LED" at 3370,4015 h118.11
  text "RF" at 4655,4015 h118.11
  text "5V-ON" at 4200,3920 h59.06 r270
  text "12V-ON" at 4575,3920 h59.06 r270
  text "MT-MONITOR V1.0.0" at 2710,3345 h118.11
  text "Carnation" at 2890,3230 h118.11
  text "ISP" at 4775,2220 h118.11
  text "MOD" at 4795,1745 h118.11
  text "DI1" at 2040,225 h118.11
  text "DI2" at 2325,225 h118.11
  text "DI3" at 2630,225 h118.11
  text "DI4" at 2935,225 h118.11
  text "DI4" at 4250,225 h118.11
  text "L" at 5395,225 h118.11
  text "H" at 5540,225 h118.11
  text "L" at 5695,225 h118.11
  text "G" at 1295,220 h118.11
  text "RX" at 1410,220 h118.11
  text "TX" at 1585,220 h118.11
  text "5V" at 1750,220 h118.11
  text "DO1" at 3335,220 h118.11
  text "DO2" at 3645,220 h118.11
  text "DO3" at 3940,220 h118.11
  text "A" at 4640,220 h118.11
  text "B" at 4790,220 h118.11
  text "A" at 4945,220 h118.11
  text "B" at 5090,220 h118.11
  text "H" at 5240,220 h118.11
  text "12V" at 545,215 h118.11
  text "G" at 725,215 h118.11
  text "FG" at 895,215 h118.11

## Text inside footprints (layer, text, board x,y; h text height)
EC1: Top Overlay "+" at 2490.35,1667.06 h31.5 r270
EC2: Top Overlay "+" at 947.94,1530.35 h31.5
EC3: Top Overlay "+" at 880.35,972.06 h31.5 r270
EC4: Top Overlay "+" at 540.35,967.06 h31.5 r270
EC5: Top Overlay "+" at 645.35,2622.06 h31.5 r270
EC6: Top Overlay "+" at 920.35,2622.06 h31.5 r270
J15: Top Overlay "1" at 2213.52,2801.7 h31.5 r270
SW1: Top Overlay "ON" at 2239.9,2222.57 h31.5
SW2: Top Overlay "ON" at 5025.68,2192 h31.5 r180
SW4: Top Overlay "ON" at 5025.32,2012 h31.5 r180
U11: Top Overlay "+" at 5790,1970 h31.5